# Altium PCB Main_old.pcbdoc
Units mil, origin at the board's own origin, x right, y up, seen from the top; angles counter-clockwise.
Board outline 2306.85 x 2651.6 mil, 2 copper layers (Top Layer, Bottom Layer); 63 components, 48 nets, 282 pads, 64 vias.
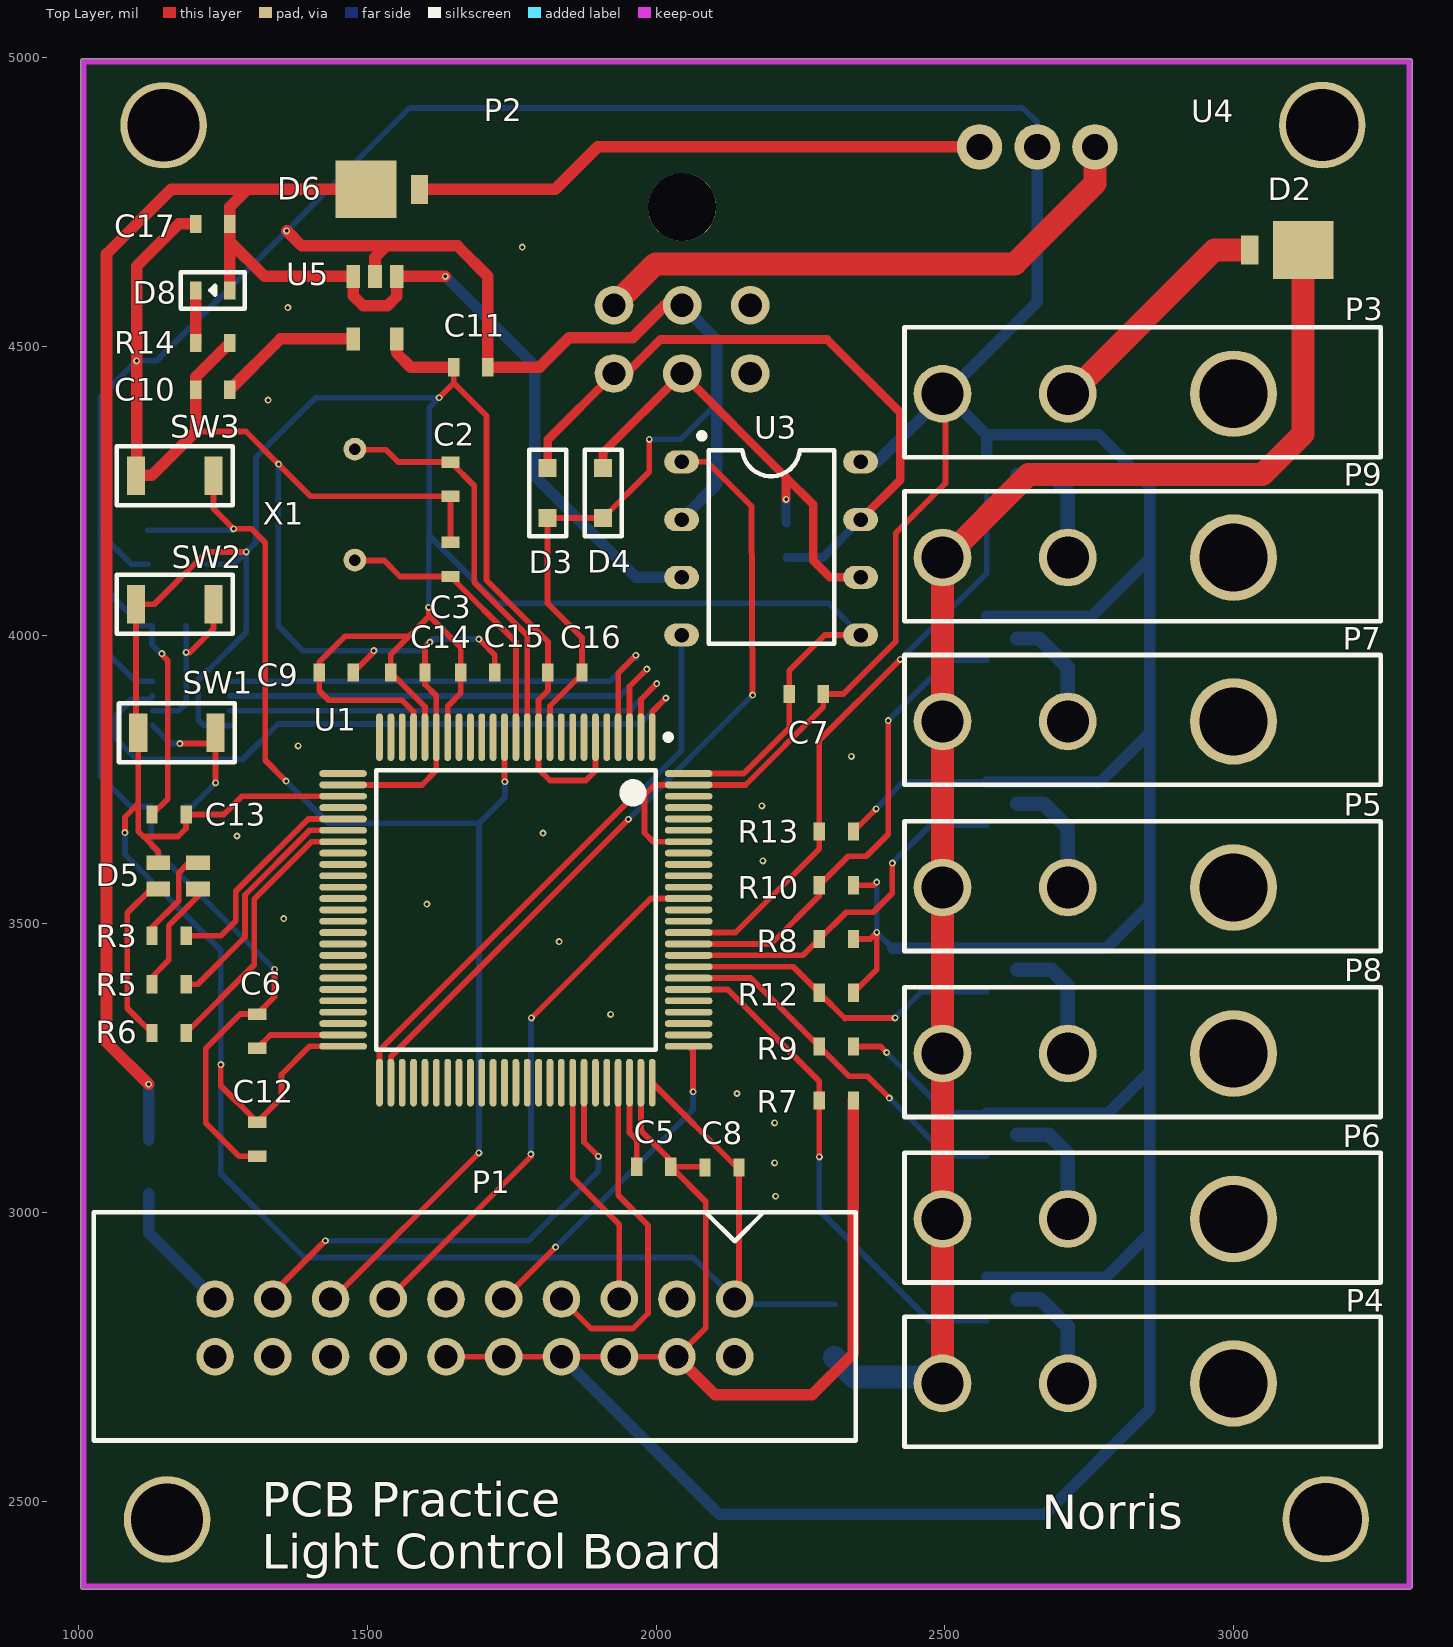
[diagram p0: Top Layer view]
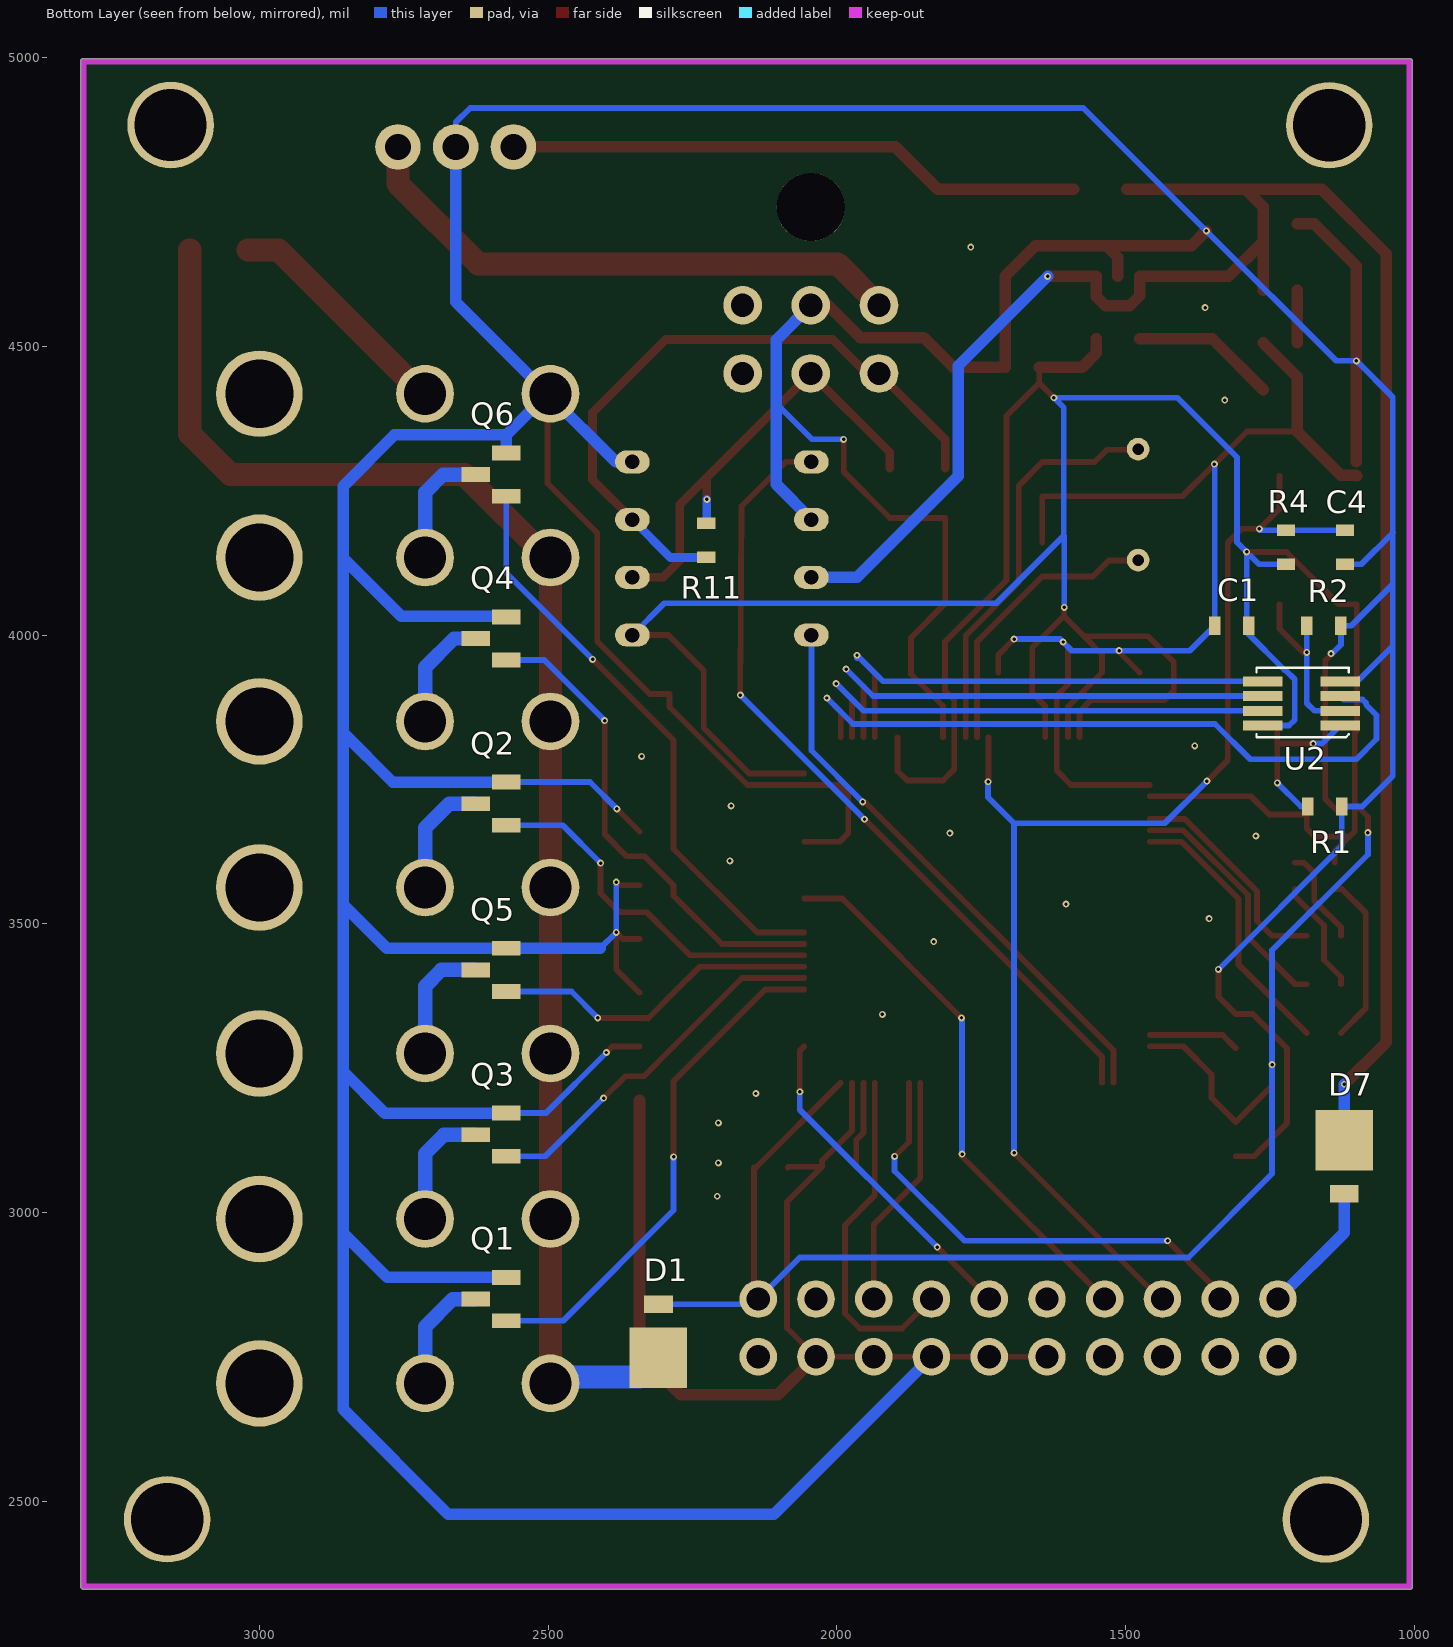
[diagram p1: Bottom Layer view, seen from below]

## Layer stack, top to bottom
Top Solder: solder mask 0.4, Solder Resist, Dk 3.5
Top Layer: signal copper 1.4
Dielectric 1: dielectric 12.6, FR-4, Dk 4.8
Bottom Layer: signal copper 1.4
Bottom Solder: solder mask 0.4, Solder Resist, Dk 3.5

## Board outline
1008,2346.97 cw(c1008,2351.99) 1003.01,2352.49 cw(c1008,2352.99) 1002.99,2352.99 1002.99,4993.56 cw(c1008,4993.56) 1008,4998.58 3304.82,4998.58 cw(c3304.82,4993.56) 3309.84,4993.56 3309.84,2352.82 cw(c3304.82,2352.82) 3307.93,2348.88 cw(c3303.99,2351.99) 3303.99,2346.97

## Design rules (kind name [scope] priority, off if disabled: settings)
Clearance [All] p1: gap=6 ignorepadtopadclearanceinfootprint=FALSE
DiffPairsRouting [All] p1: maxlimit=10 minlimit=10 mostfreqgap=10 toplayer_minwidth=15 toplayer_maxwidth=15 toplayer_prefwidth=15 bottomlayer_minwidth=15 bottomlayer_maxwidth=15 bottomlayer_prefwidth=15 maxuncoupledlength=500
PolygonConnect [All] p1: connectstyle=Direct reliefconductorwidth=10 reliefentries=4 polygonreliefangle="90 Angle" airgapwidth=10
RoutingVias [All] p1: holewidth=6 width=12 viastyle="Through Hole" minholewidth=6 minwidth=10 maxholewidth=10 maxwidth=12
SolderMaskExpansion [All] p1: expansion=4
Width [All] p1: maxlimit=40 minlimit=6 preferedwidth=10
29 further rules are at their usual default settings.

## Classes and differential pairs
component class Power: C7 C8 C9 C10 C11 C12 C13 C14 C15 C16 C17 D6 D7 D8 R14 U4 U5
component class Other: Q1 Q2 Q4 Q5 Q6 R7 R8 R9 R10 R11 R12 R13 U3
component class MCU: C1 C2 C3 C4 C5 C6 D5 R1 R2 R3 R4 R5 R6 SW1 SW2 SW3 U1 U2 X1
component class Connectors: D1 D2 D3 D4 P1 P2 P3 P4 P5 P6 P7 P8 P9
differential pair CAN2: +CAN2_P -CAN2_N

## Components (designator, comment, footprint, x,y, rotation, side; value= is the part's Value field where it differs from the comment)
C1 "SCH_GENERIC_CAPACITOR_0603" PCB_GENERIC_SMD_0603 1316,4016 r0 bottom
C2 "SCH_GENERIC_CAPACITOR_0603" PCB_GENERIC_SMD_0603 1644,4270 r90 top
C3 "SCH_GENERIC_CAPACITOR_0603" PCB_GENERIC_SMD_0603 1644,4131 r270 top
C4 "SCH_GENERIC_CAPACITOR_0603" PCB_GENERIC_SMD_0603 1120,4152 r270 bottom
C5 "SCH_GENERIC_CAPACITOR_0603" PCB_GENERIC_SMD_0603 1996,3079 r180 top
C6 "SCH_GENERIC_CAPACITOR_0603" PCB_GENERIC_SMD_0603 1309,3314 r270 top
C7 "C060-0001U-00" PCB_GENERIC_SMD_0603 2260,3898 r180 top value=0.33uF
C8 "C060-0001U-00" PCB_GENERIC_SMD_0603 2114,3078 r0 top value=0.33uF
C9 "C060-0001U-00" PCB_GENERIC_SMD_0603 1446,3935 r180 top value=0.33uF
C10 "C060-0001U-00" PCB_GENERIC_SMD_0603 1232,4425 r0 top value=10nF
C11 "C060-0001U-00" PCB_GENERIC_SMD_0603 1679,4464 r180 top value=10uF
C12 "C060-0001U-00" PCB_GENERIC_SMD_0603 1309,3127 r90 top value=0.33uF
C13 "C060-0001U-00" PCB_GENERIC_SMD_0603 1156.32,3689 r180 top value=1uF
C14 "C060-0001U-00" PCB_GENERIC_SMD_0603 1570,3935 r0 top value=1uF
C15 "C060-0001U-00" PCB_GENERIC_SMD_0603 1691,3935 r180 top value=0.33uF
C16 "C060-0001U-00" PCB_GENERIC_SMD_0603 1842,3935 r180 top value=0.33uF
C17 "C060-0001U-00" PCB_GENERIC_SMD_0603 1232,4712 r0 top value=0.1uF
D1 "Schottky Diode" "ON Semi Schottky Diode - MBRM110LT1G" 2309,2776 r90 bottom
D2 "Schottky Diode" "ON Semi Schottky Diode - MBRM110LT1G" 3093,4667 r180 top
D3 "TVS Diode" "TVS Diode" 1812,4246.06 r0 top
D4 "TVS Diode" "TVS Diode" 1908,4246.06 r0 top
D5 "D0S4-000CR-00" CLMVB-FKA 1172,3583 r0 top
D6 "Schottky Diode" "ON Semi Schottky Diode - MBRM110LT1G" 1525.06,4772 r0 top
D7 "Schottky Diode" "ON Semi Schottky Diode - MBRM110LT1G" 1121,3097.44 r270 bottom
D8 "Red LED" SMD_0603_LED 1232,4595 r180 top
P1 "SWD/VCOM Header" "Samtec TST-110-01-G-D" 1236,2850 r0 top
P2 "SCH_MLX_MICROFIT_3X2" PCB_MLX_MICROFIT_3X2 2045,4669.99 r0 top
P3 "Molex Mini-Fit 1x2" "Molex Mini-Fit Jr 2x1" 3000,4418 r90 top
P4 "Molex Mini-Fit 1x2" "Molex Mini-Fit Jr 2x1" 3000,2704 r90 top
P5 "Molex Mini-Fit 1x2" "Molex Mini-Fit Jr 2x1" 3000,3562.83 r90 top
P6 "Molex Mini-Fit 1x2" "Molex Mini-Fit Jr 2x1" 3000,2988.67 r90 top
P7 "Molex Mini-Fit 1x2" "Molex Mini-Fit Jr 2x1" 3000,3850.5 r90 top
P8 "Molex Mini-Fit 1x2" "Molex Mini-Fit Jr 2x1" 3000,3275.33 r90 top
P9 "Molex Mini-Fit 1x2" "Molex Mini-Fit Jr 2x1" 3000,4134.17 r90 top
Q1 "NMOS" "NMOS - SSM3K333R - SOTFL95P180X88-3M" 2599,2850 r0 bottom
Q2 "NMOS" "NMOS - SSM3K333R - SOTFL95P180X88-3M" 2599,3708 r0 bottom
Q3 "NMOS" "NMOS - SSM3K333R - SOTFL95P180X88-3M" 2599,3134.6 r0 bottom
Q4 "NMOS" "NMOS - SSM3K333R - SOTFL95P180X88-3M" 2599,3994 r0 bottom
Q5 "NMOS" "NMOS - SSM3K333R - SOTFL95P180X88-3M" 2599,3420 r0 bottom
Q6 "NMOS" "NMOS - SSM3K333R - SOTFL95P180X88-3M" 2599,4278 r0 bottom
R1 "SCH_GENERIC_RESISTOR_0603" PCB_GENERIC_SMD_0603 1155,3703 r180 bottom
R2 "SCH_GENERIC_RESISTOR_0603" PCB_GENERIC_SMD_0603 1156.47,4016 r0 bottom
R3 "SCH_GENERIC_RESISTOR_0603" PCB_GENERIC_SMD_0603 1156.32,3479.21 r180 top
R4 "SCH_GENERIC_RESISTOR_0603" PCB_GENERIC_SMD_0603 1222,4152 r270 bottom
R5 "SCH_GENERIC_RESISTOR_0603" PCB_GENERIC_SMD_0603 1156.32,3395.11 r180 top
R6 "SCH_GENERIC_RESISTOR_0603" PCB_GENERIC_SMD_0603 1156.32,3311 r180 top
R7 "SCH_GENERIC_RESISTOR_0603" PCB_GENERIC_SMD_0603 2312.16,3194 r0 top
R8 "SCH_GENERIC_RESISTOR_0603" PCB_GENERIC_SMD_0603 2312.16,3473.6 r0 top
R9 "SCH_GENERIC_RESISTOR_0603" PCB_GENERIC_SMD_0603 2312.16,3287.2 r0 top
R10 "SCH_GENERIC_RESISTOR_0603" PCB_GENERIC_SMD_0603 2312.16,3566.8 r0 top
R11 "SCH_GENERIC_RESISTOR_0603" PCB_GENERIC_SMD_0603 2226,4164 r270 bottom
R12 "SCH_GENERIC_RESISTOR_0603" PCB_GENERIC_SMD_0603 2312.16,3380.4 r0 top
R13 "SCH_GENERIC_RESISTOR_0603" PCB_GENERIC_SMD_0603 2312.16,3660 r0 top
R14 "SCH_GENERIC_RESISTOR_0603" PCB_GENERIC_SMD_0603 1232,4506 r0 top
SW1 "Push Button Switch" "Push Button Switch" 1170,3831 r0 top
SW2 "Push Button Switch" "Push Button Switch" 1166.18,4053.5 r0 top
SW3 "Reset Switch" "Push Button Switch" 1166.18,4276 r180 top
U1 "STM32F407VGT6" STM-LQFP100_M 1757,3524 r270 top
U2 "SN74LVC1G139" demux_24 1128.14,3843.23 r0 bottom
U3 "MCP2562" MCP2562 2199,4150 r0 top
U4 "R78E-1.0 DC/DC" R78-1.0 2660,4757 r180 top
U5 "3.3V LDO" SOT95P280X145-5N 1513,4567 r270 top
X1 "XTAL" CRYSTAL_8MHZ 1478,4225.94 r270 top

## Footprints (in the part's own frame and the unit in brackets; to place one, negate y for a bottom-side part, rotate by r counter-clockwise, add the part's x,y. Pads: shape width x height; smd on the part's side, far side on the other; paste and mask are expansions set on the pad)
CLMVB-FKA [mm] "LED RGB DIFFUSED 4SMD"
  rect 1.05x0.65 smd: 1(-0.875,0.575) 2(0.875,0.575) 3(0.875,-0.575) 4(-0.875,-0.575)
  body extent -1,-1 1,1, height 1
CRYSTAL_8MHZ [mm] "631-1100-ND"
  round 1 hole 0.5: 1(-2.44,0) 2(2.44,0)
  body extent -5.75,-2.5 5.75,2.5, height 3.55
demux_24 [mm] "SN74LVC1G139DCTR"
  rect 1.74x0.44 smd: 1(0,0) 2(0,-0.65) 3(0,-1.3) 4(0,-1.95) 5(3.4,-1.95) 6(3.4,-1.3) 7(3.4,-0.65) 8(3.4,0)
  silkscreen extent -0.38,-2.54 3.68,0.51, body extent -0.36,-2.49 3.66,0.46, height 0.91
MCP2562 [mil]
  oval 60x40 hole 25: 1(-155,150) 2(-155,50) 3(-155,-50) 4(-155,-150) 5(155,-150) 6(155,-50) 7(155,50) 8(155,150)
  silkscreen extent -125,-165 109,200, body extent -115,-170 115,170, height 210
"Molex Mini-Fit Jr 2x1" [mil]
  round 100 hole 73: 1(0,287) 2(0,504)
  round 150 hole 118: ""(0,0)
  silkscreen extent -110,-255 115,570, body extent -111,-260 117,525, height 449
"NMOS - SSM3K333R - SOTFL95P180X88-3M" [mm] "SOTFL, 3-Leads, Body 2.90x1.80mm, Pitch 0.95mm, IPC Low Density"
  rect 1.25x0.65 smd: 1(-0.675,0.95) 2(-0.675,-0.95) 3(0.675,0)
  body extent -0.95,-1.55 0.95,1.55, height 0.88
"ON Semi Schottky Diode - MBRM110LT1G" [mil]
  rect 105.12x100 smd: 1(-27.56,0)
  rect 30x50 smd: 2(64.94,0)
  body extent -78,-65 37,65, height 40
PCB_GENERIC_SMD_0603 [mm]
  rect 0.5x0.8 smd: 1(-0.75,0) 2(0.75,0)
  body extent -0.75,-0.5 0.75,0.5, height 0.45
PCB_MLX_MICROFIT_3X2 [mm]
  round 1.7 hole 1.02: 1(-3,-2.51) 2(0,-2.51) 3(3,-2.51) 4(-3,-5.51) 5(0,-5.51) 6(3,-5.51)
  round 3 hole 3 unplated: ""(0,1.81)
  body extent -6.58,-5.78 6.57,6.46, height 8.83
"Push Button Switch" [mm]
  rect 0.8x1.7 smd: 1(-1.7,0) 2(1.7,0)
  silkscreen extent -2.55,-1.3 2.55,1.3, body extent -2.16,-0.89 2.16,0.89, height 1.6
R78-1.0 [mm]
  round 2 hole 1.15: 1(-2.54,-2.25) 2(0,-2.25) 3(2.54,-2.25)
  body extent -5.8,-4.25 5.8,4.25, height 10.4
"Samtec TST-110-01-G-D" [mil] "TST-110-01-G-D"
  round 65 hole 40: 1(900,0) 2(900,-100) 3(800,0) 4(800,-100) 5(700,0) 6(700,-100) 7(600,0) 8(600,-100) 9(500,0) 10(500,-100) 11(400,0) 12(400,-100) 13(300,0) 14(300,-100) 15(200,0) 16(200,-100) 17(100,0) 18(100,-100) 19(0,0) 20(0,-100)
  silkscreen extent -210,-245 1110,150, body extent -200,-233 1100,132, height 350
SMD_0603_LED [mm]
  rect 0.5x0.8 smd: 1(-0.747,-0.047) 2(0.753,-0.047)
  silkscreen extent -1.4,-0.85 1.4,0.75, body extent -0.75,-0.55 0.75,0.45, height 0.45
SOT95P280X145-5N [mm] "SOT23, 5-Leads, Body 2.90x2.80mm, Pitch 0.95mm, IPC Medium Density"
  rect 1x0.6 smd: 1(-1.375,0.95) 2(-1.375,0) 3(-1.375,-0.95) 4(1.375,-0.95) 5(1.375,0.95)
  body extent -1.5,-1.53 1.5,1.53, height 1.45
STM-LQFP100_M [mm] "Thin QFP, 100-Leads, Body 14x14mm, Pitch 0.5mm, IPC Low Density"
  oval 2.1x0.3 smd: 1(-7.6,6) 2(-7.6,5.5) 3(-7.6,5) 4(-7.6,4.5) 5(-7.6,4) 6(-7.6,3.5) 7(-7.6,3) 8(-7.6,2.5) 9(-7.6,2) 10(-7.6,1.5) 11(-7.6,1) 12(-7.6,0.5) 13(-7.6,0) 14(-7.6,-0.5) 15(-7.6,-1) 16(-7.6,-1.5) 17(-7.6,-2) 18(-7.6,-2.5) 19(-7.6,-3) 20(-7.6,-3.5) 21(-7.6,-4) 22(-7.6,-4.5) 23(-7.6,-5) 24(-7.6,-5.5) 25(-7.6,-6) 51(7.6,-6) 52(7.6,-5.5) 53(7.6,-5) 54(7.6,-4.5) 55(7.6,-4) 56(7.6,-3.5) 57(7.6,-3) 58(7.6,-2.5) 59(7.6,-2) 60(7.6,-1.5) 61(7.6,-1) 62(7.6,-0.5) 63(7.6,0) 64(7.6,0.5) 65(7.6,1) 66(7.6,1.5) 67(7.6,2) 68(7.6,2.5) 69(7.6,3) 70(7.6,3.5) 71(7.6,4) 72(7.6,4.5) 73(7.6,5) 74(7.6,5.5) 75(7.6,6)
  oval 0.3x2.1 smd: 26(-6,-7.6) 27(-5.5,-7.6) 28(-5,-7.6) 29(-4.5,-7.6) 30(-4,-7.6) 31(-3.5,-7.6) 32(-3,-7.6) 33(-2.5,-7.6) 34(-2,-7.6) 35(-1.5,-7.6) 36(-1,-7.6) 37(-0.5,-7.6) 38(0,-7.6) 39(0.5,-7.6) 40(1,-7.6) 41(1.5,-7.6) 42(2,-7.6) 43(2.5,-7.6) 44(3,-7.6) 45(3.5,-7.6) 46(4,-7.6) 47(4.5,-7.6) 48(5,-7.6) 49(5.5,-7.6) 50(6,-7.6) 76(6,7.6) 77(5.5,7.6) 78(5,7.6) 79(4.5,7.6) 80(4,7.6) 81(3.5,7.6) 82(3,7.6) 83(2.5,7.6) 84(2,7.6) 85(1.5,7.6) 86(1,7.6) 87(0.5,7.6) 88(0,7.6) 89(-0.5,7.6) 90(-1,7.6) 91(-1.5,7.6) 92(-2,7.6) 93(-2.5,7.6) 94(-3,7.6) 95(-3.5,7.6) 96(-4,7.6) 97(-4.5,7.6) 98(-5,7.6) 99(-5.5,7.6) 100(-6,7.6)
  silkscreen extent -7.72,-6.15 6.15,6.83, body extent -7,-7 7,7, height 1.6
"TVS Diode" [mm] "Digikey: CDSOD323-T03SCCT-ND MFG:    CDSOD323-T03SC"
  rect 0.8x0.8 smd: 1(0,1.1) 2(0,-1.1)
  silkscreen extent -0.81,-1.91 0.81,1.91, body extent -0.65,-1.27 0.65,1.27, height 1.04

## Part data
C1: "Generic SMD capacitor 0603", Capacitance=0.1uF, Tolerance=*%, Voltage=*V
C2 C3: "Generic SMD capacitor 0603", Capacitance=30pF, Tolerance=*%
C4: "Generic SMD capacitor 0603", Capacitance=100nF, Tolerance=*%
C5 C6: "Generic SMD capacitor 0603", Capacitance=2.2uF, Tolerance=*%
C7 C8 C9 C10 C11 C12 C13 C14 C15 C16 C17: "CAP CER 0603 1uF 16V X5R 20%", Package=0603, Tolerance=20%, Voltage=16V
D1 D2 D6 D7: library part "ON Semi Schottky Diode - MBRM110LT1G"
D3 D4: Manufacturer=Bourns, Manufacturer ID=CDSOD323-T03SC
D5: "LED 4SMD RGB 2Vf 3Vf 3Vf 20mA 10mA 10mA", Color=RGB, Supplier Part Number 1=CLMVB-FKA-CFHEHLCBB7A363CT-ND, Supplier 1=Digi-Key
D8: library part SMD_0603_LED
Q1 Q2 Q3 Q4 Q5 Q6: library part "NMOS - SSM3K333R"
R1 R2: "Generic SMD resistor 0603", Resistance=10K
R3 R5: "Generic SMD resistor 0603", Resistance=30R
R4 R7 R8 R9 R10 R12 R13: "Generic SMD resistor 0603", Resistance=100K
R6: "Generic SMD resistor 0603", Resistance=140R
R11: "Generic SMD resistor 0603", Resistance=120R
R14: "Generic SMD resistor 0603", Resistance=150R
SW1 SW2 SW3: library part PushButtonSwitch
U1: "ARM Cortex-M4 32-bit MCU+FPU, 210 DMIPS, 1024 kB Flash, 192 kB Internal RAM, 82 I/Os, 100-pin LQFP, -40 to 85 degC, Tray", I/Os (High Current)=82, Manufacturer=STMicroelectronics, Operating Frequency(F) (Processor speed) (MHz)=168, Supplier Part Number 1=497-11605-ND, Supply Voltage(Vcc) max (V)=3.6, Supply Voltage(Vcc) min (V)=1.8, ComponentLink1Description="Manufacturer URL", ComponentLink1URL=http://www.st.com/web/en/home.html, ComponentLink2Description=Datasheet, ComponentLink2URL=http://www.st.com/st-web-ui/static/active/en/resource/technical/document/datasheet/DM00037051.pdf, ComponentLink3Description="Package Specification", ComponentLink3URL=http://www.st.com/st-web-ui/static/active/en/resource/technical/document/data_brief/DM00071938.pdf, Core="ARM Cortex-M4", D/A Converter=2x12-bit, DatasheetVersion="Rev. 4", FLASH Size (Prog) (kB)=1024, Internal RAM Size (kB)=192, Mounting Technology="Surface Mount", PackageDescription="100-Pin Low Profile Quad Flat Package, 14 x 14 mm Body, 0.5 mm Pitch", PackageReference=LQFP100, PackageVersion="Rev. 1, 06/2013", Packing=Tray, PartNumber=STM32F407VGT6, Supplier 1=Digi-Key, Supplier 2=Farnell, Supplier 3=Newark, Supplier 4=Mouser, Supplier Part Number 2=2064368, Supplier Part Number 3=73T2333, Supplier Part Number 4=511-STM32F407VGT6
U2: library part demux_24
U4: library part R78E-1.0
U5: library part 3V3LDO_TPS73633DBVR_SOT23-5, "Linear Voltage Regulator IC Positive Fixed 1 Output 3.3V 400mA SOT-23-5"
X1: library part Crystal, Frequency=8MHz

## Free pads (board coordinates)
  round 150 hole 125: ""(1146.96,4882.99) ""(1152.96,2468.3) ""(3153.73,4883.28) ""(3159.73,2468.59)

## Via types
v1: diameter 12, hole 6, Top Layer to Bottom Layer, 64 vias

## Nets (pads, with @x,y where several pads share a name; then routed paths per layer and width w, separated by ;. In a path a pad name is that pad's centre, name@x,y a point inside that pad or via, vN(x,y) a via of type N, cw(c..) or ccw(c..) an arc to the next point about the centre after c; other vN are vias at no path point)
3V3: C1.1 C7.2 C8.2 C9.2 C11.2 C12.2 C13.1 C14.1 C15.2 C16.2 D1.2 D5.1 P1.1 R4.2 SW1.1 SW2.1 U1.6 U1.11 U1.19 U1.21 U1.22 U1.28 U1.50 U1.75 U1.100 U2.8 U3.5 U5.5 | length 8455.8
  Top Layer w10: v1(1080,3658) 1080,3685 1103.07,3708.07 ; D5.1 1137.55,3625.45 1112,3651 ; v1(1246,3256) 1246,3219.53 C12.2 1351,3198.53 1351,3239 1399.78,3287.78 U1.50 ; v1(1290.06,4144) 1221,4144 1130.5,4053.5 SW2.1 1099.25,3834.82 SW1.1 1103.07,3708.07 ; U1.28 1282.85,3720.85 1251,3689 C13.1 1185.84,3664.84 1172,3651 1112,3651 ; U1.22 1579.83,3867.17 1560,3887 1433,3887 1416.47,3903.53 C9.2 1416.47,3953.47 1461,3998 1572,3998 ; U1.21 1599.52,3875.95 C14.1 1540.47,3966.47 1572,3998 ; v1(1606,4048) 1606,4034 1607,4033 ; v1(1624,4411) 1649.47,4436.47 ; U1.19 1638.89,3876.89 1661.47,3899.47 C15.2 1661.47,3978.53 1607,4033 ; C11.2 1649.47,4436.47 ; U1.6 1894.8,3764.8 1878,3748 1816,3748 1796.37,3767.63 U1.11 1796.37,3887.74 1812.47,3903.84 C16.2 1812.47,3988.53 1706,4095 1706,4379.94 1649.47,4436.47 ; U1.75 2140.01,3078 C8.2 2143.53,2857.53 P1.1 ; U1.100 2151.59,3760.22 2230.47,3839.1 C7.2 2230.47,3938.47 2292,4000 U3.5 ; 1103.07,3708.07 1103.07,3659.93 1112,3651 ; 1572,3998 1607,4033
  Top Layer w20: U5.5 1550.4,4488.6 1575,4464 C11.2
  Bottom Layer w10: v1(1080,3658) 1080,3620 1246,3454 v1(1246,3256) 1246,3067 1391,2922 2064,2922 P1.1 2145.06,2840.94 D1.2 ; R4.2 1268.53,4122.47 1283,4136.94 ; U2.8 1216.77,3843.23 1207,3853 1207,3923.47 1223.19,3939.66 1224.66,3939.66 1290.06,4005.06 v1(1290.06,4144) 1307,4160.94 1307,4308 1410,4411 v1(1624,4411) 1607,4394 1607,4172 ; v1(1606,4048) 1606,4171 1607,4172 ; U3.5 2299,4055 1724,4055 1607,4172
5V: C17.2 D6.1 D7.1 D8.1 U3.3 U5.1 U5.3 | length 3466.7
  Top Layer w10: D8.1 D8.1@1261.53,4596.97
  Top Layer w20: v1(1121,3222) 1048,3295 1048,4660 1160,4772 1292,4772 ; D8.1@1261.53,4596.97 1261.53,4681.47 ; D6.1 1292,4772 ; v1(1635,4621.13) U5.1 1550.4,4586.4 1534,4570 1493,4570 1475.6,4587.4 U5.3 1321.87,4621.13 1261.53,4681.47 ; 1261.53,4681.47 C17.2 1261.53,4741.53 1292,4772
  Bottom Layer w20: D7.1 v1(1121,3222) ; v1(1635,4621.13) 1790,4466.13 1790,4275 1965,4100 U3.3
"5V - DCDC": D6.2 U4.3 | length 1000.5
  Top Layer w20: D6.2 1825,4772 1898.58,4845.58 U4.3
"5V - Debug": D7.2 P1.19 | length 230.1
  Bottom Layer w20: D7.2 1121,2965 P1.19
12V: P2.1 U4.1 | length 984
  Top Layer w40: P2.1 1998.72,4643 2621,4643 2760,4782 U4.1
"12V - Power": D2.2 P3.1 | length 405.1
  Top Layer w40: P3.1@2718,4418 2967,4667 D2.2@3020,4667
BE: Q5.1 R12.1 U1.83 | length 572.6
  Top Layer w10: U1.83 2237.46,3425.57 R12.1 2327.03,3336 2328.03,3337 v1(2414,3337)
  Bottom Layer w10: v1(2414,3337) 2459.6,3382.6 Q5.1
BLUE_LED: R3.1 U1.30 | length 385.8
  Top Layer w10: R3.1 1246.21,3479.21 1272,3505 1272,3556.25 1397.23,3681.48 U1.30
Brake: P8.1 Q5.3 | length 215.7
  Bottom Layer w25: Q5.3 2685,3420 2713,3392 P8.1
CAN2_N: D4.1 P2.5 R11.1 U3.6 | length 812.5
  Top Layer w15: D4.1 1908,4316.06 P2.5 2225,4273.06 ; v1(2225,4235) 2225,4273.06 ; U3.6 2301,4100 2272,4129 2272,4226.06 2225,4273.06
  Bottom Layer w15: v1(2225,4235) 2225,4194.53 R11.1
CAN2_P: D3.1 P2.4 R11.2 U3.7 | length 1153.1
  Top Layer w15: D3.1 1812,4338.17 P2.4 1948.06,4453.06 2007,4512 2296,4512 2423,4385 2423,4269 U3.7
  Bottom Layer w15: R11.2 2288.47,4134.47 U3.7
CAN2_RX: U1.51 U3.4 | length 994.3
  Top Layer w10: U1.51 1520.78,3280.82 1950.96,3711 v1(1955,3711)
  Bottom Layer w10: v1(1955,3711) 2044,3800 U3.4
CAN2_TX: U1.52 U3.1 | length 1410.6
  Top Layer w10: U1.52 1540.46,3269.46 v1(1952,3681) ; U3.1 2088,4300 2165,4223 v1(2167,3896)
  Bottom Layer w10: v1(1952,3681) v1(2167,3896)
"Emergency Strobe": P9.1 Q6.3 | length 213.1
  Bottom Layer w25: Q6.3 2682,4278 2713,4247 P9.1
ES: Q6.1 R13.1 U1.86 | length 1017.5
  Top Layer w10: U1.86 2137.63,3484.63 2282.63,3629.63 R13.1 2282.63,3817.63 v1(2423,3958)
  Bottom Layer w10: v1(2423,3958) 2572.43,4107.43 Q6.1
GND: C1.2 C2.1 C3.1 C4.2 C5.1 C6.1 C7.1 C8.1 C9.1 C10.1 C11.1 C12.1 C13.2 C14.2 C15.1 C16.1 C17.1 D3.2 D4.2 P1.4 P1.6 P1.8 P1.10 P1.12 P2.2 P3.2 Q1.2 Q2.2 Q3.2 Q4.2 Q5.2 Q6.2 R1.2 R2.1 R7.2 R8.2 R9.2 R10.2 R12.2 R13.2 R14.2 SW3.2 U1.10 U1.20 U1.27 U1.74 U1.94 U1.99 U2.4 U3.2 U3.8 U4.2 U5.2 | length 18474.6
  Top Layer w10: C13.2 1154,3716.21 1154,3956 1144,3966 v1(1144,3968) ; 1202.47,4352.47 1289.53,4352.47 v1(1346,4296) 1401.53,4240.47 C2.1 C3.1 ; C12.1 1277.53,3097.47 1220,3155 1220,3284 1279.53,3343.53 C6.1 1339,3373.53 v1(1339,3421) ; U1.27 1594.54,3740.54 1619.2,3765.2 U1.20 1619.2,3894.8 1599.53,3914.47 C14.2 1599.53,3979.53 v1(1608,3988) ; C9.1 1511,3970.47 v1(1511,3973) ; P1.12 P1.10 P1.8 P1.6 P1.4 2086,2800 2086,3018.53 C5.1 ; v1(1693,3993) 1720.53,3965.47 C15.1 ; U1.10 1816.06,3877.06 1871.53,3932.53 C16.1 1871.53,3995.47 1812,4055 D3.2 D4.2 1988,4282.76 v1(1988,4339) ; U1.74 1973.54,3141.46 2025.53,3089.47 C5.1 ; U1.94 1994.89,3642.11 1980,3657 1980,3723 1997.54,3740.54 U1.99 2154.54,3740.54 2289.53,3875.53 C7.1 2324,3898 2415,3989 2415,4177 2501,4263 P3.2@2501,4418 ; C8.1 2083.47,3079 C5.1 ; R9.2 2388.8,3287.2 v1(2399,3277) ; R12.2 2382,3420.71 v1(2382,3485) 2370.6,3473.6 R8.2 ; R10.2 2376.8,3566.8 v1(2382,3572) ; R13.2 v1@2379.69,3698
  Top Layer w20: SW3.2 1100,4276.75 1126.75,4276.75 1202.47,4352.47 C10.1 1202.47,4446.94 R14.2 ; SW3.2@1100,4300 v1(1100,4475) 1100,4639 1173,4712 C17.1 ; v1(1360,4700) 1386,4674 1533,4674 ; U5.2 1513,4654 1533,4674 ; P1.4 2102,2684 2270,2684 2341.69,2755.69 R7.2 ; P2.2 2015.17,4571.17 1959,4515 1849,4515 1798,4464 C11.1 1708.53,4621.47 1656,4674 1533,4674
  Bottom Layer w10: 1036.5,4177.5 1037,4177 ; C4.2 1091.53,4122.47 1037,4177 ; U2.4 1098,3920 1037,3981 ; v1(1144,3968) 1142,3968 1126.94,3983.06 R2.1 1109,4016 1037,4088 ; v1(1339,3421) 1125.47,3634.53 R1.2 1090,3703 1037,3756 1037,3981 ; v1(1346,4296) 1345.53,4295.53 C1.2 1388.53,3973 v1(1511,3973) 1593,3973 v1(1608,3988) 1613,3993 v1(1693,3993) ; v1(1988,4339) 2043,4339 2105,4401 ; v1(2381,3699) 2427.4,3745.4 Q2.2 ; v1(2382,3572) v1(2382,3485) 2409.6,3457.4 ; v1(2399,3277) 2504,3172 Q3.2 ; U4.2 2660,4888 2635,4913 1573,4913 v1(1360,4700) 1135,4475 v1(1100,4475) 1037,4412 1037,4177 ; 1037,3981 1037,4088 ; 1037,4088 1037,4177
  Bottom Layer w20: P1.8 2109,2477 2673,2477 2855,2659 2855,2964 ; U3.2 2105,4261 2105,4401 2105,4511.17 P2.2 ; U3.8 2383,4300 P3.2@2501,4418 ; 2409.6,3457.4 Q5.2 2779.4,3457.4 2855,3533 ; Q1.2 2778.4,2887.4 2855,2964 ; Q3.2 2783,3172 2855,3244 ; Q2.2 2769.4,3745.4 2855,3831 ; Q4.2@2572.43,4032.4 2754.4,4032.4 2855,4133 ; Q6.2 2572.43,4346.57 ; U4.2 2660,4577 P3.2@2501,4418 ; P3.2@2501,4418 2572.43,4346.57 ; 2572.43,4346.57 2766.43,4346.57 2855,4258 2855,4133 ; 2855,2964 2855,3244 ; 2855,3244 2855,3533 ; 2855,3533 2855,3831 ; 2855,3831 2855,4133
  other v1: 2207,3028 2205,3086 2205,3155 2140,3206 1921,3343 1832,3469 1355,3509 1603,3534 2185,3609 1274,3652 1804,3657 2183,3704 2338,3790 1380,3808 1328,4407 1362,4567 1768,4672
GREEN_LED: R5.1 U1.31 | length 425
  Top Layer w10: R5.1 1206.11,3395.11 1288,3477 1288,3549.63 1400.17,3661.8 U1.31
"Headlights (High)": P5.1 Q2.3 | length 208
  Bottom Layer w25: Q2.3 2671,3708 2713,3666 P5.1
"Headlights (Low)": P7.1 Q4.3 | length 201.6
  Bottom Layer w25: Q4.3 2663,3994 2713,3944 P7.1
HHE: Q2.1 R8.1 U1.84 | length 640
  Top Layer w10: U1.84 2254.29,3445.26 R8.1 2329.03,3520 2376,3520 2409,3553 v1(2409,3605)
  Bottom Layer w10: v1(2409,3605) 2474.6,3670.6 Q2.1
HLE: Q4.1 R10.1 U1.85 | length 845.9
  Top Layer w10: U1.85 2198.94,3464.94 2282.63,3548.63 R10.1 2332.83,3617 2364,3617 2402,3655 v1(2402,3852)
  Bottom Layer w10: v1(2402,3852) 2506.6,3956.6 Q4.1
"Left Signal": P6.1 Q3.3 | length 214.3
  Bottom Layer w25: Q3.3 2680.4,3134.6 2713,3102 P6.1
LSE: Q3.1 R9.1 U1.82 | length 644.1
  Top Layer w10: U1.82 2163.94,3405.89 R9.1 2333.83,3236 2366,3236 v1(2404,3198)
  Bottom Layer w10: v1(2404,3198) 2504.8,3097.2 Q3.1
NetC3_2: C3.2 U1.13 X1.2 | length 506.2
  Top Layer w10: X1.2@1478,4119.87 1487.13,4129 1529,4129 1556.53,4101.47 C3.2 1757,3988.47 U1.13
NetC5_2: C5.2 U1.73 | length 151
  Top Layer w10: U1.73 1953.85,3138.15 1966.47,3125.53 C5.2
NetC6_2: C6.2 U1.49 | length 158.3
  Top Layer w10: C6.2 1331.99,3307.46 U1.49
NetC10_2: C10.2 U5.4 | length 250.5
  Top Layer w20: C10.2 1349.39,4512.87 U5.4
NetD5_2: D5.2 R3.2 | length 168.7
  Top Layer w10: R3.2 1126.79,3493.79 1173,3540 1173,3588 1190.64,3605.64 D5.2
NetD5_3: D5.3 R5.2 | length 198.3
  Top Layer w10: R5.2 1126.79,3407.79 1156,3437 1156,3497 1206.45,3547.45 D5.3
NetD5_4: D5.4 R6.2 | length 296.4
  Top Layer w10: R6.2 1084,3353.79 1084,3519 1125.36,3560.36 D5.4
NetD8_2: D8.2 R14.1 | length 90.9
  Top Layer w20: D8.2 1202.35,4506.12 R14.1
NetR1_1: R1.1 SW1.2 U2.1 | length 278.2
  Top Layer w10: v1(1175,3812) SW1.2@1236.93,3812 ; SW1.2 SW1.2@1236.93,3812 ; v1(1237,3744) 1236.93,3744.07 SW1.2@1236.93,3812
  Bottom Layer w10: U2.1 1159.37,3812 v1(1175,3812) ; R1.1 1196,3703 v1(1237,3744)
NetR2_2: R2.2 SW2.2 U2.2 | length 303.8
  Top Layer w10: v1(1186,3970) 1192,3970 1233.11,4011.11 SW2.2
  Bottom Layer w10: U2.2 1172.82,3868.82 1186,3882 v1(1186,3970) R2.2
NRST: C4.1 P1.15 R4.1 SW3.1 U1.14 | length 2213.5
  Top Layer w10: SW3.1 1233.11,4218.89 v1(1268,4184) 1299,4184 1323,4160 1323,3783 v1(1359,3747) ; P1.15 1440,2850 v1(1693,3103) ; U1.14 1737.32,3746.68 v1(1738,3746)
  Bottom Layer w10: C4.1 R4.1 1265.53,4181.53 v1(1268,4184) ; v1(1359,3747) 1432,3674 1693,3674 ; v1(1693,3103) 1693,3674 ; v1(1738,3746) 1738,3719 1693,3674
RED_LED: R6.1 U1.32 | length 475.8
  Top Layer w10: R6.1 1304,3429.16 1304,3543 1403.11,3642.11 U1.32
"Right Signal": P4.1 Q1.3 | length 205.3
  Bottom Layer w25: Q1.3 2665,2850 2713,2802 P4.1
RSE: Q1.1 R7.1 U1.81 | length 884.9
  Top Layer w10: U1.81 2123.8,3386.2 2282.63,3227.37 R7.1 v1(2282.63,3096.37)
  Bottom Layer w10: v1(2282.63,3096.37) 2282.63,3003.63 2473.67,2812.6 Q1.1
SCLK: C2.2 U1.12 X1.1 | length 709.9
  Top Layer w10: X1.1@1478,4312 1487,4321 1532,4321 1553.47,4299.53 C2.2 1685,4258.53 1685,4091 1776.69,3999.31 U1.12
SWCLK: P1.9 U1.76 | length 576.9
  Top Layer w10: P1.9 v1(1826,2940) ; U1.76 2064,3279.99 v1(2064,3209)
  Bottom Layer w10: v1(1826,2940) 2064,3178 v1(2064,3209)
SWDIO: P1.7 U1.72 | length 603.2
  Top Layer w10: P1.7 1887,2799 1960,2799 1986,2825 1986,2978 1934.17,3029.83 U1.72
SWO: P1.13 U1.89 | length 947.5
  Top Layer w10: P1.13 1783,3097 v1(1783,3101) ; v1(1784,3337) 1990.69,3543.69 U1.89
  Bottom Layer w10: v1(1783,3101) 1783,3336 v1(1784,3337)
UART1_RX: P1.17 U1.69 | length 824.9
  Top Layer w10: P1.17 1336,2860 v1(1427,2951) ; U1.69 1875.11,3121.89 v1(1900,3097)
  Bottom Layer w10: v1(1427,2951) 1779,2951 1900,3072 v1(1900,3097)
UART1_TX: P1.5 U1.68 | length 408.2
  Top Layer w10: U1.68 1855.43,3059.57 1936,2979 P1.5
"Variable Output Voltage": D1.1 D2.1 P4.2 P5.2 P6.2 P7.2 P8.2 P9.2 | length 2664.9
  Top Layer w40: P4.2 P6.2 P8.2 P5.2 P7.2 2496,4129.17 2644.83,4278 3050,4278 3120.56,4348.56 D2.1
  Bottom Layer w40: D1.1 2342.44,2715 P4.2@2501,2715
Y0: U1.2 U2.7 | length 862.7
  Top Layer w10: U1.2 1973.54,3888.54 v1(2001,3916)
  Bottom Layer w10: U2.7 1953.82,3868.82 v1(2001,3916)
Y1: U1.3 U2.6 | length 871.6
  Top Layer w10: U1.3 1953.85,3910.85 v1(1984,3941)
  Bottom Layer w10: U2.6 1937.41,3894.41 v1(1984,3941)
Y2: U1.4 U2.5 | length 881.2
  Top Layer w10: U1.4 1934.17,3934.17 v1(1965,3965)
  Bottom Layer w10: U2.5 1920,3920 v1(1965,3965) v1@1965,3960
Y3: U1.1 U2.3 | length 1207.9
  Top Layer w10: U1.1 1993.22,3867.22 v1(2017,3891)
  Bottom Layer w10: U2.3 1122.21,3888.48 1089.33,3888.48 1082.89,3882.04 1082.89,3878.89 1065,3861 1065,3820 1100,3785 1284,3785 1345,3846 1972,3846 v1(2017,3891)
pads on no net: P1.2 P1.3 P1.11 P1.14 P1.16 P1.18 P1.20 P2. P2.3 P2.6 P3. P4. P5. P6. P7. P8. P9. U1.5 U1.7 U1.8 U1.9 U1.15 U1.16 U1.17 U1.18 U1.23 U1.24 U1.25 U1.26 U1.29 U1.33 U1.34 U1.35 U1.36 U1.37 U1.38 U1.39 U1.40 U1.41 U1.42 U1.43 U1.44 U1.45 U1.46 U1.47 U1.48 U1.53 U1.54 U1.55 U1.56 U1.57 U1.58 U1.59 U1.60 U1.61 U1.62 U1.63 U1.64 U1.65 U1.66 U1.67 U1.70 U1.71 U1.77 U1.78 U1.79 U1.80 U1.87 U1.88 U1.90 U1.91 U1.92 U1.93 U1.95 U1.96 U1.97 U1.98

## Keep-outs
Keep-Out Layer:
  lines w10: 1008,2351.99 3303.99,2351.99 3304.82,2352.82 3304.82,4993.56 1008,4993.56 1008,2352.99

## Silkscreen, mask and mechanical layers (free items; w line width, h text height)
Top Overlay:
  text "Norris" at 2668,2451 h60
  text "PCB Practice  / Light Control Board" at 1317,2383 h60